# Altium PCB PCB_CHIPI_RELAY.PcbDoc
Units mil, origin at the board's own origin, x right, y up, seen from the top; angles counter-clockwise.
Board outline 2580 x 785 mil, 2 copper layers (Top Layer, Bottom Layer); 9 components, 9 nets, 25 pads, 2 vias.
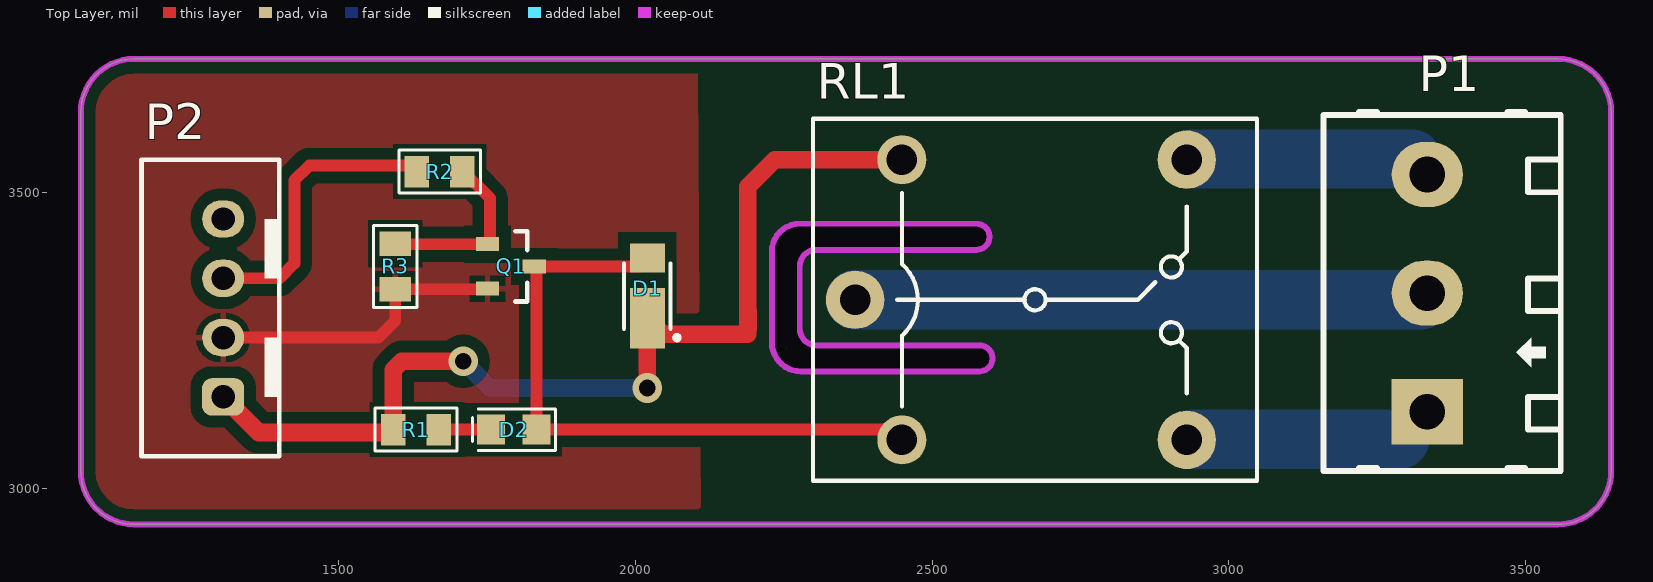
[diagram p0: Top Layer view]
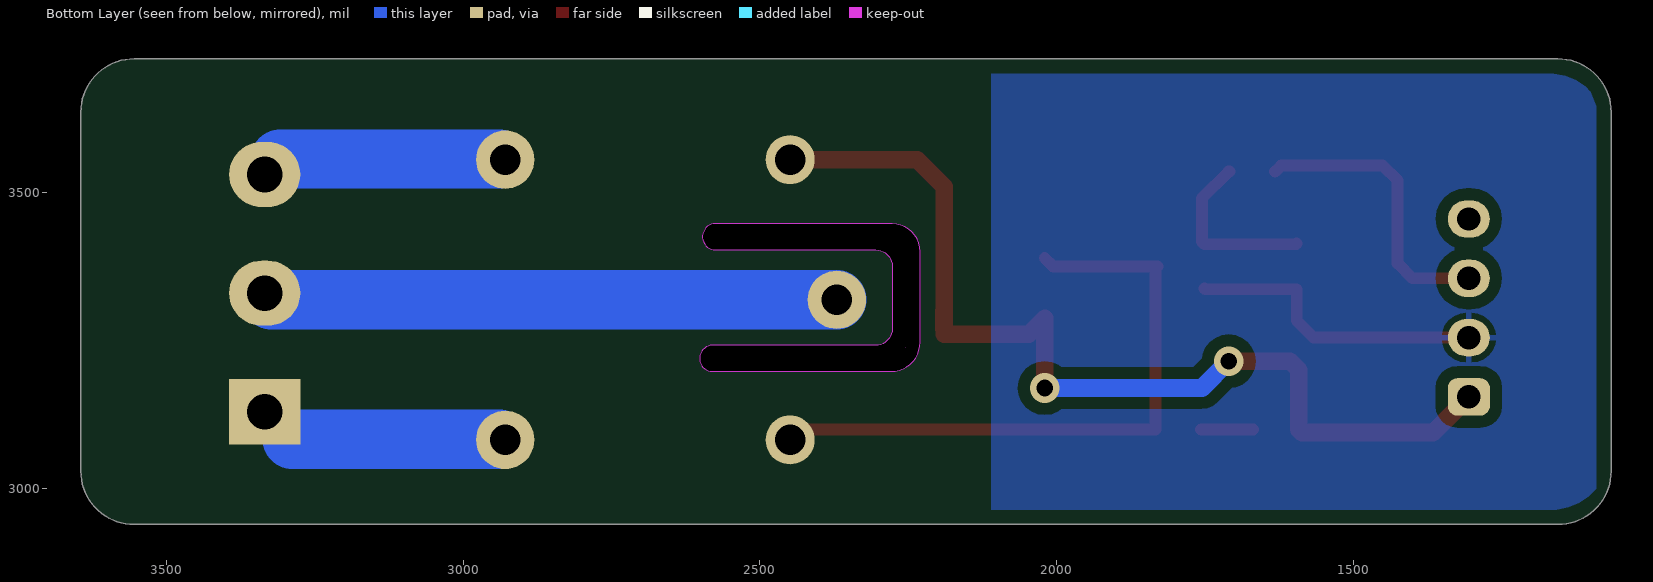
[diagram p1: Bottom Layer view, seen from below]

## Layer stack, top to bottom
Top Solder: solder mask 0.4, Solder Resist, Dk 3.5
Top Layer: signal copper 1.4
Dielectric 1: dielectric 12.6, FR-4, Dk 4.8
Bottom Layer: signal copper 1.4
Bottom Solder: solder mask 0.4, Solder Resist, Dk 3.5

## Board outline
1065,3030 1065,3635 cw(c1155,3635) 1155,3725 3555,3725 cw(c3555,3635) 3645,3635 3645,3030 cw(c3555,3030) 3555,2940 1155,2940 cw(c1155,3030)
cut-out: 2230,3247 2230,3400 cw(c2277,3400) 2277,3447 2575,3447 cw(c2575,3425) 2575,3403 2305,3403 ccw(c2305,3375) 2277,3375 2277,3270 ccw(c2305,3270) 2305,3242 2580,3242 cw(c2580,3220) 2580,3198 2279,3198 cw(c2279,3247)
cut-out: 2255,3238
cut-out: 2255,3238

## Design rules (kind name [scope] priority, off if disabled: settings)
Clearance [All] p1: gap=20 ignorepadtopadclearanceinfootprint=FALSE
PolygonConnect [All] p1: connectstyle=Relief reliefconductorwidth=10 reliefentries=4 polygonreliefangle="90 Angle" airgapwidth=10
RoutingVias [All] p1: holewidth=28 width=50 viastyle="Through Hole" minholewidth=28 minwidth=50 maxholewidth=28 maxwidth=50
SolderMaskExpansion [All] p1: expansion=4
Width [All] p1: maxlimit=100 minlimit=10 preferedwidth=20
30 further rules are at their usual default settings.

## Components (designator, comment, footprint, x,y, rotation, side; value= is the part's Value field where it differs from the comment)
D1 "1N4007" "Diode PowerDI123" 2020,3325 r270 top
D2 "Led" "Led 0805 RED" 1795,3100 r0 top
P1 "Header 3" HDR/Terminal/3 3335,3330 r90 top
P2 "Header 4" HDR/Header/4/BOX/RED 1305,3305 r90 top
Q1 "C1815" SOT-23 1790,3375 r0 top
R1 "1k" "R 0805" 1630,3100 r180 top
R2 "4.7k" "R 0805" 1670,3535 r0 top
R3 "47k" "R 0805" 1595,3375 r90 top
RL1 "Relay SPDT" RL_SPDT_10A 2650,3318.75 r0 top

## Footprints (in the part's own frame and the unit in brackets; to place one, negate y for a bottom-side part, rotate by r counter-clockwise, add the part's x,y. Pads: shape width x height; smd on the part's side, far side on the other; paste and mask are expansions set on the pad)
"Diode PowerDI123" [mm]
  rect 1.25x1.5 smd: 1(-1.625,0)
  rect 2.6x1.5 smd: 2(0.95,0)
  silkscreen extent -1.4,-1 1.88,1.37, body extent -1.95,-0.97 1.95,0.96, height 1
HDR/Header/4/BOX/RED [mm]
  rrect50% 1.6x1.8 hole 1: 1(-3.81,0)
  oval 1.6x1.8 hole 1: 2(-1.27,0) 3(1.27,0) 4(3.81,0)
  silkscreen extent -6.35,-2.41 6.35,3.5, body extent -6.2,-2.3 6.2,3.45, height 7
HDR/Terminal/3 [mil]
  rect 110x120 hole 60: 1(-200,0)
  oval 110x120 hole 60: 2(0,0) 3(200,0)
  silkscreen extent -300,-225 305,175, body extent -329,-218 300,168, height 559
"Led 0805 RED" [mm] "Led SMD 0805"
  rect 1.2x1.3 smd: 1(-0.975,0) 2(0.975,0)
  silkscreen extent -1.78,-0.89 1.78,0.89, body extent -1.01,-0.63 1.01,0.62, height 1.1
"R 0805" [mm] "Chip Resistor, 2-Leads, Body 2.0x1.3mm, IPC Medium Density"
  rect 1.05x1.35 smd: 1(-0.975,0) 2(0.975,0)
  silkscreen extent -1.75,-0.92 1.75,0.92, body extent -1,-0.61 1,0.59, height 0.5
RL_SPDT_10A [mm] "Relay SPDT, 5 pin, 10A,W 650mil, L 800mil, H 800mil"
  round 2.5 hole 1.3: 1(-7.1,0) 2(7.1,-6) 3(7.1,6)
  round 2.1 hole 1.3: 4(-5.1,-6) 5(-5.1,6)
  silkscreen extent -8.9,-7.75 10.1,7.75, body extent -8.9,-7.75 10.1,7.75, height 15.4
SOT-23 [mm] "SOT23, 3-Leads, Body 3.0x2.5mm (max), Pitch 0.95mm, IPC Medium Density"
  rect 1x0.6 smd: 1(-1,0.95) 2(-1,-0.95) 3(1,0)
  silkscreen extent 0.2,-1.5 0.7,1.5, body extent -1.28,-1.46 1.27,1.46, height 0.95

## Part data
D1: library part Diode, "Default Diode"
D2: "Typical LED"
P1: "Header, 3-Pin"
P2: "Header, 4-Pin"
Q1: library part "Transistor NPN", "NPN Bipolar Transistor"
R1 R2 R3: library part Resistor, "Resistor"

## Via types
v1: diameter 50, hole 28, Top Layer to Bottom Layer, 2 vias

## Nets (pads, with @x,y where several pads share a name; then routed paths per layer and width w, separated by ;. In a path a pad name is that pad's centre, name@x,y a point inside that pad or via, vN(x,y) a via of type N, cw(c..) or ccw(c..) an arc to the next point about the centre after c; other vN are vias at no path point)
+5: D1.2 P2.1 R1.2 RL1.5 | length 1693.1
  Top Layer w30: P2.1 1365,3095 1586.61,3095 R1.2 1591.61,3200.63 1605.98,3215 v1(1710,3215) ; v1(2020,3170) D1.2 2046.8,3260.8 2189.31,3260.8 2189.31,3268.94 2190,3269.63 2190,3300 2189.27,3300.73 2189.27,3509.27 2235,3555 RL1.5
  Bottom Layer w30: v1(1710,3215) 1755,3170 v1(2020,3170)
COM: P1.2 RL1.1 | length 969.2
  Bottom Layer w100: RL1.1 3323.75,3318.75 P1.2
GND: P2.2 Q1.2 R3.1 | length 511
  Top Layer w20: P2.2 1566.61,3255 1595,3283.39 R3.1 1749.65,3336.61 Q1.2
NC: P1.3 RL1.3 | length 406.3
  Bottom Layer w20: P1.3@3308.78,3556.22 P1.3
  Bottom Layer w100: RL1.3@2939.53,3556.22 P1.3@3308.78,3556.22
NetD1_1: D1.1 D2.2 Q1.3 RL1.4 | length 1096.1
  Top Layer w20: D1.1 2006.02,3375 Q1.3 1833.39,3370.98 D2.2 2431.74,3100 RL1.4
NetD2_1: D2.1 R1.1 | length 88.2
  Top Layer w20: R1.1 D2.1
NetQ1_1: Q1.1 R2.2 R3.2 | length 300.7
  Top Layer w20: R3.2 1595.98,3412.4 Q1.1 1755,3416.77 1755,3490 1710,3535 R2.2
NO: P1.1 RL1.2 | length 414.6
  Bottom Layer w20: P1.1@3288.78,3083.78 P1.1
  Bottom Layer w100: RL1.2@2939.53,3083.78 P1.1@3288.78,3083.78
SIGNAL: P2.3 R2.1 | length 491.5
  Top Layer w20: P2.3 1400,3355 1425,3380 1425,3520 1450,3545 1621.61,3545 R2.1
pads on no net: P2.4

## Polygon pours and split planes (outlines as drawn)
GND on Bottom Layer (solid, remove dead copper, pour order 48): 1100,3670 1100.71,3670.71 cw(c1171.42,3600) 1171.42,3700 2110,3700 2110,2965 1166.42,2965 cw(c1166.42,3065) 1095.71,2994.29 1090,3000 1090,3645
no net on Bottom Layer (solid, pour order 46): 1130,3650
no net on Bottom Layer (solid, pour order 44): 1090,3645
no net on Bottom Layer (solid, pour order 40): 1090,3645
no net on Bottom Layer (solid, pour order 38): 1100,3670
no net on Bottom Layer "Bottom Layer-No Net" (solid, pour order 34): 1100,3685
no net on Bottom Layer "Bottom Layer-No Net 1" (solid, pour order 28): 1095,3705
no net on Bottom Layer "Bottom Layer-No Net 2" (solid, pour order 18): 1135,3725
no net on Bottom Layer "Bottom Layer-No Net 3" (solid, pour order 16): 1090,3700
no net on Bottom Layer "Bottom Layer-No Net 4" (solid, pour order 12): 1135,3715
no net on Bottom Layer "Bottom Layer-No Net 5" (solid, pour order 10): 1090,3700
no net on Bottom Layer "Bottom Layer-No Net 6" (solid, pour order 2): 1055,3735
GND on Top Layer "Top Layer-GND" (solid, remove dead copper, pour order 24): 1065,3725 2105,3725 2110,2940 1065,2940

## Keep-outs
Top Layer:
  lines w10: 1065,3030 ccw(c1155,3030) 1155,2940 3555,2940 ccw(c3555,3030) 3645,3030 3645,3635 ccw(c3555,3635) 3555,3725 1155,3725 ccw(c1155,3635) 1065,3635 1065,3030 ; 2230,3247 ccw(c2279,3247) 2279,3198 2305,3198 2580,3198 ccw(c2580,3220) 2580,3242 2305,3242 cw(c2305,3270) 2277,3270 2277,3375 cw(c2305,3375) 2305,3403 2575,3403 ccw(c2575,3425) 2575,3447 2305,3447 2277,3447 ccw(c2277,3400) 2230,3400 2230,3247

## Other copper
Top Layer:
  pour cut-out: 2255,3238